# Altium PCB MCU.PcbDoc
Units mil, origin at the board's own origin, x right, y up, seen from the top; angles counter-clockwise.
Board outline 3664.37 x 2121.06 mil, 2 copper layers (Top Layer, Bottom Layer); 41 components, 39 nets, 222 pads, 31 vias.
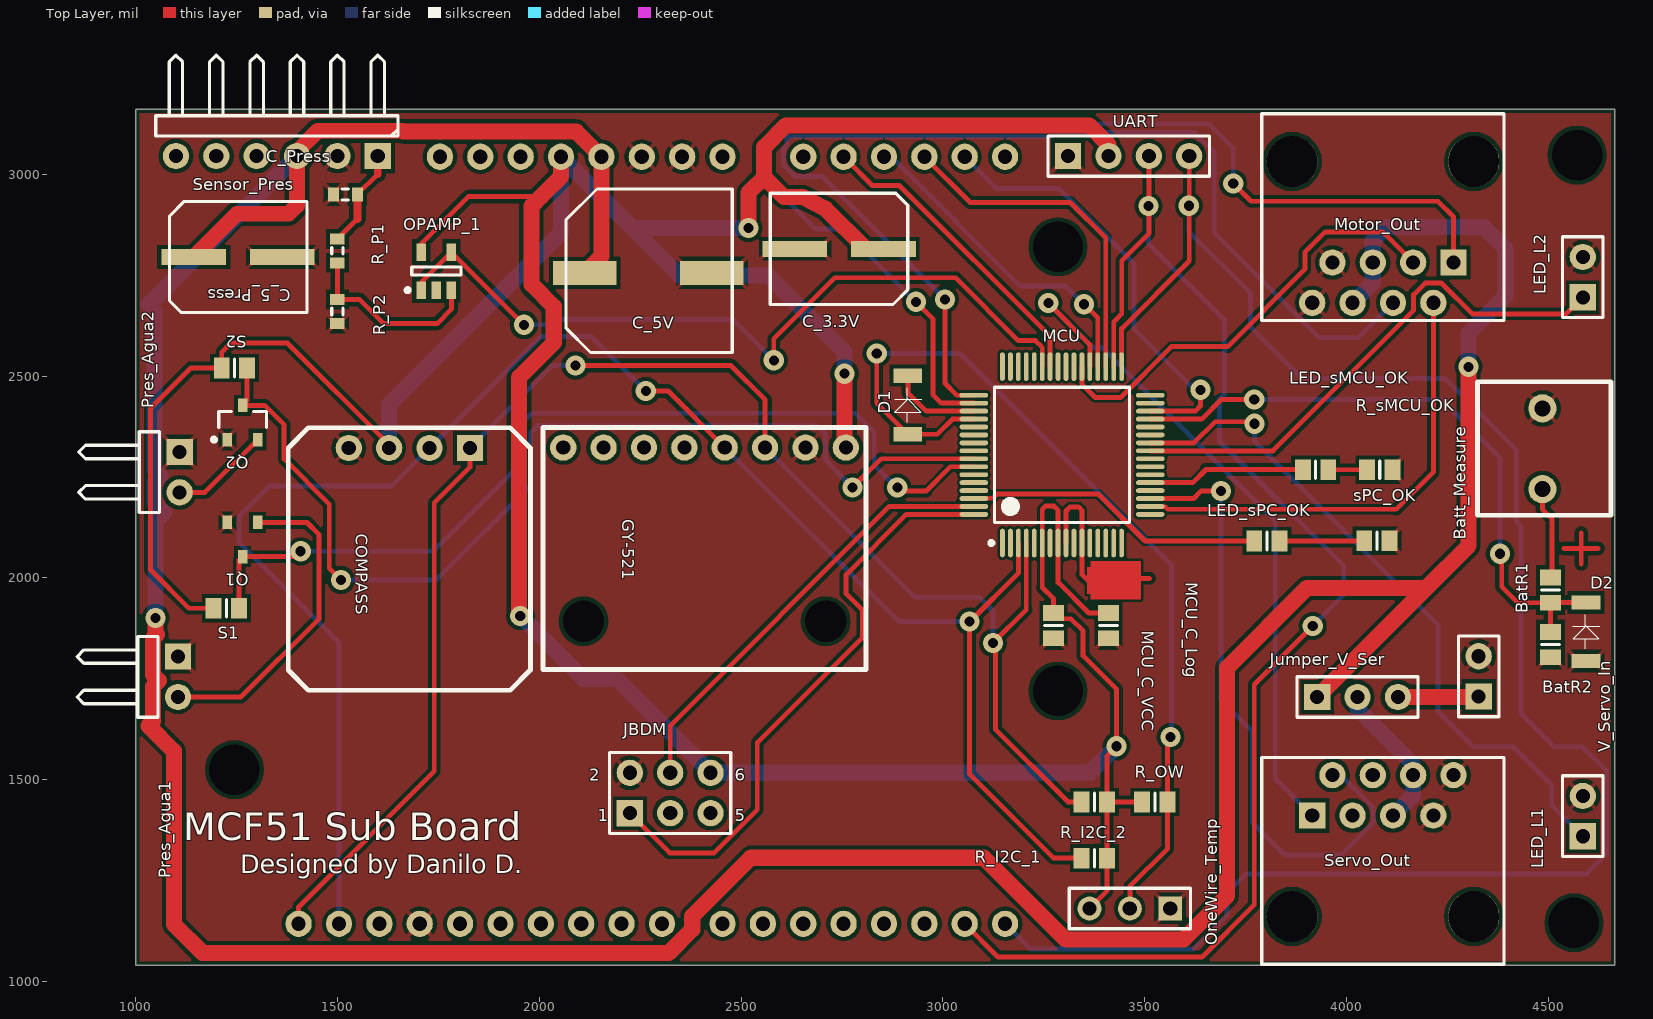
[diagram p0: Top Layer view]
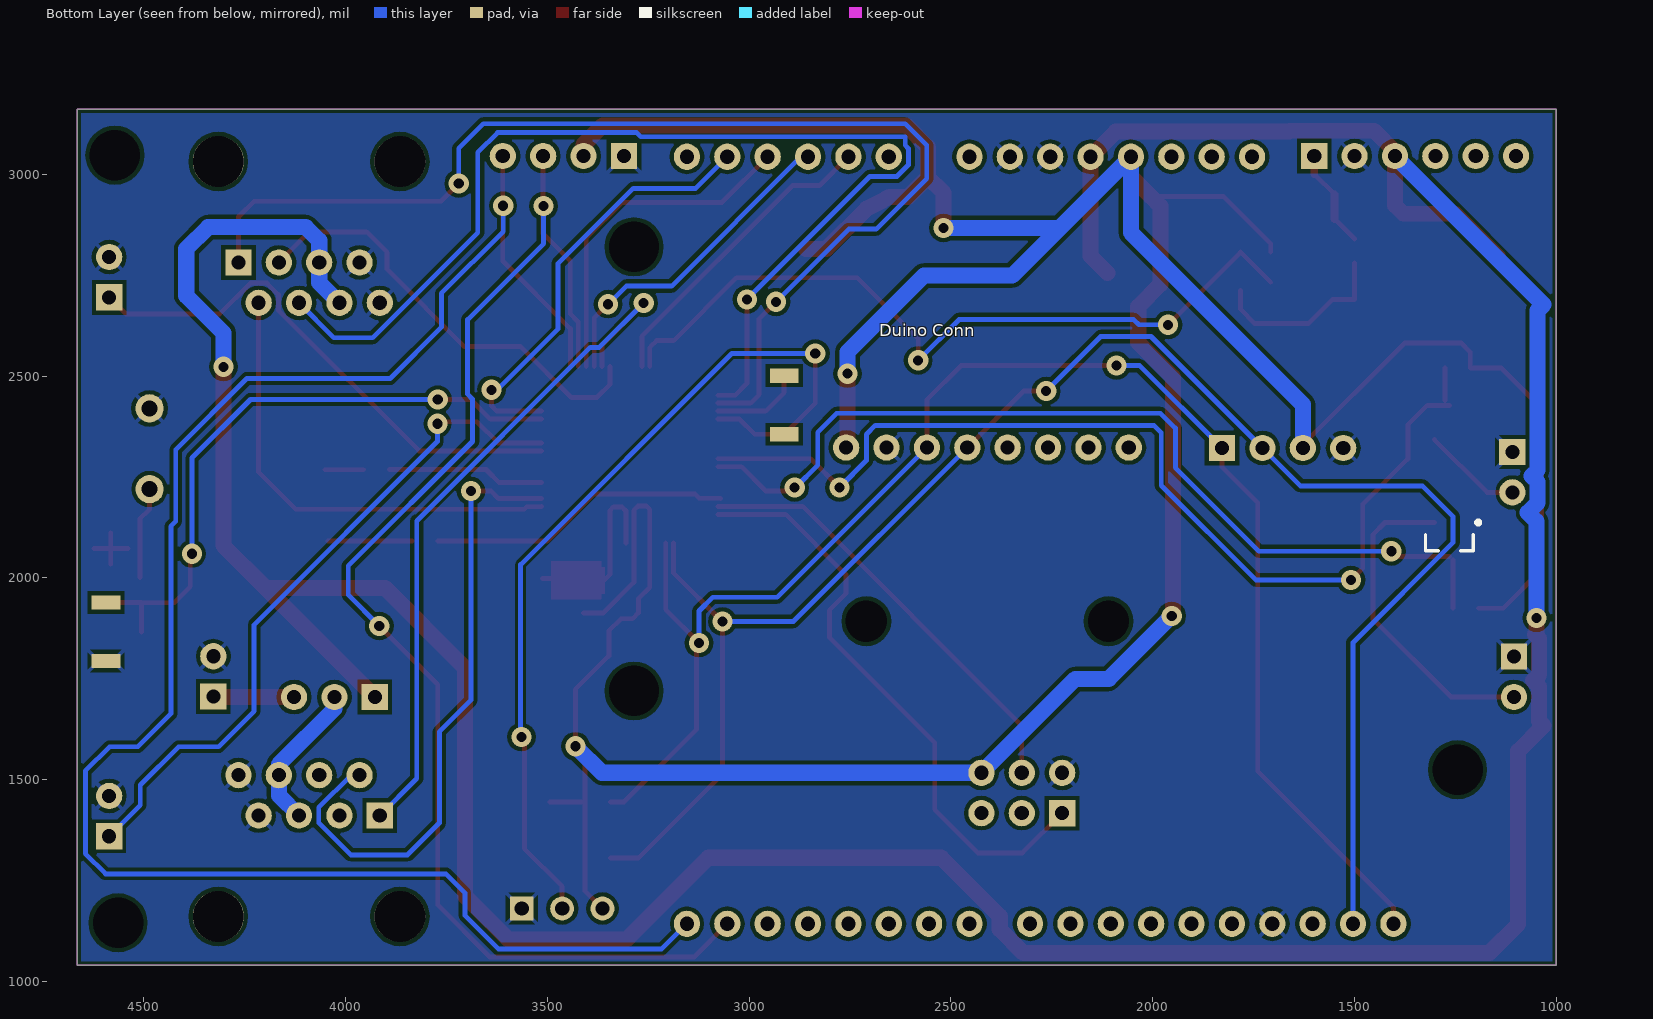
[diagram p1: Bottom Layer view, seen from below]

## Layer stack, top to bottom
Top Solder: solder mask 0.4, Solder Resist, Dk 3.5
Top Layer: signal copper 1.4
Dielectric 1: dielectric 12.6, FR-4, Dk 4.8
Bottom Layer: signal copper 1.4
Bottom Solder: solder mask 0.4, Solder Resist, Dk 3.5

## Board outline
1000,1040.35 4664.37,1040.35 4664.37,3161.42 1000,3161.42

## Design rules (kind name [scope] priority, off if disabled: settings)
Clearance "Clearance Room MCU" [TouchesRoom('MCU_ROOM_R')] p1: gap=7
Clearance Clearence_All [All] p2: gap=10
ComponentClearance ComponentClearance_1 [All] p1: gap=10 collisioncheckmode=3 verticalgap=10 showdistances=FALSE
PlaneConnect [All] p1: planeconnectstyle=Relief reliefexpansion=20 reliefentries=2 reliefconductorwidth=10 reliefairgap=10
PolygonConnect [All] p1: connectstyle=Relief reliefconductorwidth=10 reliefentries=4 polygonreliefangle="45 Angle" airgapwidth=10
RoomDefinition MCU_ROOM_R [InComponentClass('Components Class 1')] p1: confinementstyle=ConfineIn formatcopy=TRUE lockcomponents=FALSE outline 3012,2579 3631,2579 3631,2022 3012,2022
RoutingCorners [All] p1: cornerstyle=45-Degree minsetback=100 maxsetback=1000
RoutingVias [All] p1: holewidth=25 width=50 viastyle="Through Hole" minholewidth=25 minwidth=50 maxholewidth=25 maxwidth=50
SolderMaskExpansion [All] p1: expansion=4
Width [All] p1: maxlimit=40 minlimit=10 preferedwidth=12
27 further rules are at their usual default settings.

## Classes and differential pairs
component class "Components Class 1": MCU
component class PWM_OUTS: Jumper_V_Ser LED_L1 LED_L2 Motor_Out Servo_Out V_Servo_In
component class Presencia_Agua: Pres_Agua1 Pres_Agua2 Q1 Q2 S1 S2
component class MCU: BatR1 BatR2 Batt_Measure COMPASS D1 D2 GY-521 JBDM LED_sMCU_OK LED_sPC_OK OneWire_Temp R_I2C_1 R_I2C_2 R_OW R_sMCU_OK sPC_OK UART
component class Fuente: C_3.3V C_5V MCU_C_Log MCU_C_VCC
component class "Expansion Board": "Duino Conn"
component class ADC_PRES: C_5_Press C_Press OPAMP_1 R_P1 R_P2 Sensor_Pres

## Components (designator, comment, footprint, x,y, rotation, side; value= is the part's Value field where it differs from the comment)
BatR1 "Res" 6-0805_L 4505,1970 r90 top
BatR2 "Res" 6-0805_L 4505,1835 r90 top
Batt_Measure "Header Batt_M" "5.08mm 200 mil Screw Terminal SF" 4485,2420 r270 top
C_3.3V "Cap Pol1" "Capacitor S Panasonic" 2742,2815 r180 top
C_5_Press "Cap Pol1" "Capacitor S Panasonic" 1255,2795 r0 top
C_5V "330C" "C Panasonic Size Cap Pol" 2270,2755.5 r0 top
C_Press "Cap" J1-0603 1520,2950 r0 top
COMPASS "HMC6352" HMC6352_SF 1988.19,2381.89 r180 top
D1 "Diode 1N4148" miniMELF 2955,2332 r90 top
D2 "Diode Zenner 3.3V" miniMELF 4635,1770 r90 top
"Duino Conn" "" UNO_R3_SHIELD_NOLABELS 1003.94,1043.31 r90 bottom locked
GY-521 "MPU-6050 Board GY-521" GY-521 1909.45,2322.83 r270 top
JBDM "Header 3X2" HDR2X3 2224.41,1417.32 r0 top
Jumper_V_Ser "Header 3" HDR1X3#1 3927,1705 r0 top
LED_L1 "Header 1" HDR1X2 4585,1360 r90 top
LED_L2 "Header 2" HDR1X2 4585,2695 r90 top
LED_sMCU_OK "LED" 6-0805_L 3923,2268 r0 top
LED_sPC_OK "LED" 6-0805_L 3802.64,2091.46 r0 top
MCU "MCF51QE128CLH" 840F-02_N 3295,2305 r90 top
MCU_C_Log "Cap Pol1" 6-0805_L 3410,1882 r270 top
MCU_C_VCC "Cap Pol1" 6-0805_L 3274,1882 r270 top
Motor_Out "" RJ45-8 4089.75,3031.5 r180 top
OneWire_Temp "" HDR1X3#2 3562.99,1181.1 r180 top
OPAMP_1 "OPA345NA/250" TI-DBV5_N 1745,2760 r90 top
Pres_Agua1 "Jumper_STANDAR" HDR1X2H 1105.32,1805.12 r270 top
Pres_Agua2 "Jumper_STANDAR" HDR1X2H 1109.25,2312.01 r270 top
Q1 "PNP" SOT-23B_L#1 1265,2095 r90 top
Q2 "PNP" SOT-23B_L#2 1265,2385 r90 top
R_I2C_1 "Res3" 6-0805_L 3375,1306 r0 top
R_I2C_2 "Res3" 6-0805_L 3375,1445 r0 top
R_OW "Res" 6-0805_L 3525,1445 r180 top
R_P1 "Res3" J1-0603 1500,2810 r90 top
R_P2 "Res3" J1-0603 1500,2660 r90 top
R_sMCU_OK "Res" 6-0805_L 4082,2268 r180 top
S1 "Res" 6-0805_L 1225,1925 r180 top
S2 "Res" 6-0805_L 1245,2520 r180 top
Sensor_Pres "MPX5700AP" HDR1X6H 1600,3045 r180 top (schematic designator *)
Servo_Out "" RJ45-8 4089.75,1161.42 r0 top
sPC_OK "Res" 6-0805_L 4075,2092 r180 top
UART "Header 4" HDR1X4 3310,3045 r0 top
V_Servo_In "Header 2" HDR1X2 4327,1706 r90 top

## Footprints (in the part's own frame and the unit in brackets; to place one, negate y for a bottom-side part, rotate by r counter-clockwise, add the part's x,y. Pads: shape width x height; smd on the part's side, far side on the other; paste and mask are expansions set on the pad)
"5.08mm 200 mil Screw Terminal SF" [mil]
  round 70 hole 40: 1(0,0) 2(200,0)
  silkscreen extent -66,-161 265,170
6-0805_L [mm] "Chip Resistor, Body 2.0x1.2mm, IPC High Density"
  rect 1x1.3 smd: 1(-0.8,0) 2(0.8,0)
  silkscreen extent 0,-0.55 0,0.55, body extent -1.07,-0.7 1.07,0.7, height 0.7
840F-02_N [mm] "Thin QFP, 64-Leads, Body 10x10mm, Pitch 0.5mm, IPC Medium Density"
  oval 1.8x0.3 smd: 1(-5.55,3.75) 2(-5.55,3.25) 3(-5.55,2.75) 4(-5.55,2.25) 5(-5.55,1.75) 6(-5.55,1.25) 7(-5.55,0.75) 8(-5.55,0.25) 9(-5.55,-0.25) 10(-5.55,-0.75) 11(-5.55,-1.25) 12(-5.55,-1.75) 13(-5.55,-2.25) 14(-5.55,-2.75) 15(-5.55,-3.25) 16(-5.55,-3.75) 33(5.55,-3.75) 34(5.55,-3.25) 35(5.55,-2.75) 36(5.55,-2.25) 37(5.55,-1.75) 38(5.55,-1.25) 39(5.55,-0.75) 40(5.55,-0.25) 41(5.55,0.25) 42(5.55,0.75) 43(5.55,1.25) 44(5.55,1.75) 45(5.55,2.25) 46(5.55,2.75) 47(5.55,3.25) 48(5.55,3.75)
  oval 0.3x1.8 smd: 17(-3.75,-5.55) 18(-3.25,-5.55) 19(-2.75,-5.55) 20(-2.25,-5.55) 21(-1.75,-5.55) 22(-1.25,-5.55) 23(-0.75,-5.55) 24(-0.25,-5.55) 25(0.25,-5.55) 26(0.75,-5.55) 27(1.25,-5.55) 28(1.75,-5.55) 29(2.25,-5.55) 30(2.75,-5.55) 31(3.25,-5.55) 32(3.75,-5.55) 49(3.75,5.55) 50(3.25,5.55) 51(2.75,5.55) 52(2.25,5.55) 53(1.75,5.55) 54(1.25,5.55) 55(0.75,5.55) 56(0.25,5.55) 57(-0.25,5.55) 58(-0.75,5.55) 59(-1.25,5.55) 60(-1.75,5.55) 61(-2.25,5.55) 62(-2.75,5.55) 63(-3.25,5.55) 64(-3.75,5.55)
  silkscreen extent -5.67,-4.25 4.25,4.57, body extent -5,-5 5,5, height 1.6
"C Panasonic Size Cap Pol" [mm]
  rect 4x1.5 smd: 1(-4,0) 2(4,0)
  silkscreen extent -5.18,-5 5.28,5.28, body extent -5.09,-5.09 5.21,5.21, height 12.7
"Capacitor S Panasonic" [mil]
  rect 160x39.37 smd: 1(-110.74,0) 2(108.74,0)
  silkscreen extent -171,-138 170,138, body extent -169,-164 158,162, height 276
GY-521 [mil]
  round 65 hole 35: 1(0,850) 2(0,750) 3(0,650) 4(0,550) 5(0,450) 6(0,350) 7(0,250) 8(0,150)
  round 60 hole 102.36: SCREW1(430,800) SCREW2(430,200)
  silkscreen extent -50,100 550,900
HDR1X2 [mil] "Connector; Header; 2 Position"
  rect 65x65 hole 35: 1(0,0)
  round 65 hole 35: 2(100,0)
  silkscreen extent -50,-50 150,50
HDR1X2H [mil] "Connector; Header; 2 Position; Right Angle"
  rect 65x65 hole 35: 1(0,0)
  round 65 hole 35: 2(100,0)
  silkscreen extent -50,-250 150,-50
HDR1X3#1 [mil] "Connector; Header; 3 Position"
  rect 65x65 hole 35: 1(0,0)
  round 65 hole 35: 2(100,0) 3(200,0)
  silkscreen extent -50,-50 250,50
HDR1X3#2 [mil] "Connector; Header; 3 Position"
  rect 59.06x59.06 hole 35.43: 1(0,0)
  round 59.06 hole 35.43: 2(100,0) 3(200,0)
  silkscreen extent -50,-50 250,50
HDR1X4 [mil] "Connector; Header; 4 Position"
  rect 65x65 hole 35: 1(0,0)
  round 65 hole 35: 2(100,0) 3(200,0) 4(300,0)
  silkscreen extent -50,-50 350,50
HDR1X6H [mil] "Connector; Header; 6 Position; Right Angle"
  rect 65x65 hole 35: 1(0,0)
  round 65 hole 35: 2(100,0) 3(200,0) 4(300,0) 5(400,0) 6(500,0)
  silkscreen extent -50,-250 550,-50
HDR2X3 [mil] "Connector; Header; 3x2 Position"
  rect 65x65 hole 35: 1(0,0)
  round 65 hole 35: 2(0,100) 3(100,0) 4(100,100) 5(200,0) 6(200,100)
  silkscreen extent -50,-50 250,150
HMC6352_SF [mil]
  rect 65x65 hole 35: 1(160,60)
  round 65 hole 35: 2(260,60) 3(360,60) 4(460,60)
  silkscreen extent 10,10 610,660
J1-0603 [mm] "Chip Resistor, Body 1.6x0.8mm, IPC High Density"
  rect 0.7x0.9 smd: 1(-0.75,0) 2(0.75,0)
  silkscreen extent -0.2,-0.35 0.2,0.35, body extent -0.85,-0.48 0.85,0.48, height 0.9
miniMELF [mil]
  rect 35.43x70.87 all layers, no hole: 1(24,42) 2(169,42)
  silkscreen extent 54,8 139,75
RJ45-8 [mil]
  round 126 hole 126: 1(-225,0) 1(225,0)
  rect 65x65 hole 35: 1(-175,250)
  round 65 hole 35: 2(-125,350) 3(-75,250) 4(-25,350) 5(25,250) 6(75,350) 7(125,250) 8(175,350)
  silkscreen extent -300,-118 300,394
SOT-23B_L#1 [mm] "SOT23, 3-Leads, Body 2.9x1.3mm, Pitch 0.95mm, Lead Span 2.4mm, IPC High Density"
  rect 0.85x0.6 smd: 1(1.075,0.95) 2(1.075,-0.95) 3(-1.075,0)
  body extent -0.7,-1.5 0.7,1.5, height 1.14
SOT-23B_L#2 [mm] "SOT23, 3-Leads, Body 2.9x1.3mm, Pitch 0.95mm, Lead Span 2.4mm, IPC High Density"
  rect 0.85x0.6 smd: 1(-1.075,0.95) 2(-1.075,-0.95) 3(1.075,0)
  silkscreen extent -1.2,-1.5 0.7,1.92, body extent -0.7,-1.5 0.7,1.5, height 1.14
TI-DBV5_N [mm] "SOT23, 5-Leads, Body 2.9x1.6mm, Pitch 0.95mm, IPC Medium Density"
  rect 1.1x0.6 smd: 1(-1.2,0.95) 2(-1.2,0) 3(-1.2,-0.95) 4(1.2,-0.95) 5(1.2,0.95)
  silkscreen extent -1.32,-1.55 0.25,1.92, body extent -0.87,-1.52 0.87,1.53, height 1.45
UNO_R3_SHIELD_NOLABELS [mil]
  round 65 hole 35: 3.3V(2000,1050) 5V(2000,1150) A0(2000,1650) A1(2000,1750) A2(2000,1850) A3(2000,1950) A4(2000,2050) A5(2000,2150) AREF(100,600) D2(100,1950) D3(100,1850) D4(100,1750) D5(100,1650) D6(100,1550) D7(100,1450) D8(100,1300) D9(100,1200) D10(100,1100) D11(100,1000) D12(100,900) D13(100,800) GND@0(2000,1250) GND@1(2000,1350) GND@2(100,700) IOREF(2000,850) NC(2000,750) RES(2000,950) RX(100,2150) SCL(100,400) SDA(100,500) TX(100,2050) VIN(2000,1450)

## Part data
BatR1 BatR2 R_OW R_sMCU_OK S1 S2 sPC_OK: library part Res3, "Resistor"
Batt_Measure LED_L1: library part "Header 2", "Header, 2-Pin"
C_3.3V C_5_Press MCU_C_Log MCU_C_VCC: "Polarized Capacitor (Radial)"
C_5V: library part "Cap Pol1", "Polarized Capacitor (Radial)"
C_Press: "Capacitor"
D1: "High Conductance Fast Diode"
D2: library part "Diode 1N4148", "High Conductance Fast Diode"
"Duino Conn": library part ARDUINO_R3_SHIELDNOLABELS
GY-521: library part GY-521
JBDM: "Header, 3-Pin, Dual row"
Jumper_V_Ser: "Header, 3-Pin"
LED_L2 V_Servo_In: "Header, 2-Pin"
LED_sMCU_OK LED_sPC_OK: library part LED2, "Typical RED, GREEN, YELLOW, AMBER GaAs LED"
MCU: "MCF51QE128 ColdFire V1 Microcontroller, 32-Bit, 128KB Flash, 8KB RAM, -40°C to 85°C, 64-Pin LQFP"
Motor_Out Servo_Out: library part RJ45-8PTH
OneWire_Temp: library part M03-SCREW-5MM
OPAMP_1: "Low Power, Single-Supply, Rail-to-Rail Operational Amplifier MicroAmplifier(TM) Series, 2.7 to 5.5 V, -55 to 125 degC, 5-pin SOT23 (DBV5), Green (RoHS & no Sb/Br)"
Q1 Q2: "PNP Bipolar Transistor"
R_I2C_1 R_I2C_2 R_P1 R_P2: "Resistor"
UART: "Header, 4-Pin"

## Free pads (board coordinates)
  round 70 hole 125: 0(3285,1720) 1(3285,2820) 2(1245,1525)
  round 60 hole 125: 3(4562.99,1145.67) 5(4570.87,3047.24)

## Via types
v1: diameter 50, hole 25, Top Layer to Bottom Layer, 31 vias

## Nets (pads, with @x,y where several pads share a name; then routed paths per layer and width w, separated by ;. In a path a pad name is that pad's centre, name@x,y a point inside that pad or via, vN(x,y) a via of type N, cw(c..) or ccw(c..) an arc to the next point about the centre after c; other vN are vias at no path point)
+3.3V: "Duino Conn.3.3V" C_3.3V.1 COMPASS.3 GY-521.1 JBDM.6 MCU.6 MCU.8 MCU_C_Log.1 MCU_C_VCC.1 OneWire_Temp.3 OPAMP_1.5 R_I2C_1.2 R_I2C_2.2 R_OW.2 S1.2 S2.2 UART.2 | length 10173.5
  Top Layer w12: S1.2 1132,1925 1037,2020 1037,2420 1137,2520 S2.2 1213.5,2559.5 1236,2582 1376,2582 COMPASS.3@1628.19,2329.81 ; OPAMP_1.5 1707.6,2827.6 1825,2945 2005,2945 ; MCU.6 3245.79,1976.21 3274,1948 MCU_C_VCC.1 3288.5,1899 3317,1899 3347,1869 3347,1807 3430,1724 v1(3430,1583) 3406.5,1559.5 R_I2C_2.2 ; MCU.6@3246,2086.71 3246,2170 3254,2178 3275,2178 3285.16,2167.84 MCU.8 3285.16,1988.84 3360.5,1913.5 MCU_C_Log.1 ; OneWire_Temp.3 3406.5,1224.61 R_I2C_1.2 R_I2C_2.2 ; R_OW.2 R_I2C_2.2
  Top Layer w40: v1(1953,1906) 1950,1909 1950,2497 2036,2583 2036,2672 1981,2727 1981,2921 2005,2945 2053.94,2993.94 2053.94,3043.31 ; v1(2518,2867) 2518,2954 2557,2993 ; GY-521.1@2756,2326.29 v1(2756,2506) ; C_3.3V.1@2859,2815 2808.74,2815 2708.74,2915 2651.74,2944 2606,2944 2557,2993 ; UART.2 3410,3073 3362,3121 2611,3121 2557,3067 2557,2993
  Bottom Layer w40: COMPASS.3 1628.19,2429.59 2053.94,2855.34 2053.94,3043.31 2143.12,2954.12 ; v1(1953,1906) 2109,1750 2191.73,1750 JBDM.6 3364.32,1517.32 v1(3430,1583) ; v1(2518,2867) 2230.25,2867 2143.12,2954.12 ; v1(2756,2506) 2756,2560 2567,2749 2348.25,2749 2143.12,2954.12
+5V: "Duino Conn.5V" C_5_Press.1 C_5V.1 Jumper_V_Ser.1 Motor_Out.5 Motor_Out.6 Sensor_Pres.3 | length 9558.1
  Top Layer w39.37: C_5_Press.1 1251.26,2902 1379,2902 1400,2923 Sensor_Pres.3 1400,3056.37 1451.32,3107.68 1660.99,3107.68 1662.69,3105.99 2092,3105.99 2092,3105.25 2153.94,3043.31 2153.94,2796.92 C_5V.1
  Top Layer w40: v1(1049.65,1901) 1049.65,1862.35 1052.38,1859.62 1042.81,1850.04 1042.81,1760.19 1057.41,1745.6 1042.81,1731.01 1042.81,1644.81 1032,1634 1095.09,1570.91 1095.09,1270.18 1095,1270.08 1095,1142.05 1166.2,1070.85 2320.58,1070.85 2379,1129.27 2379,1162 2524,1307 3101,1307 3304,1104 3595.49,1104 3704,1212.51 3704,1778 3901,1975 4197,1975 ; Jumper_V_Ser.1 4197,1975 ; v1(4302,2523) 4302,2080 4197,1975
  Bottom Layer w40: v1(1049.65,1901) 1049.65,2140.52 1071,2161.87 1046.75,2186.12 1046.75,2237.89 1061.34,2252.49 1046.75,2267.08 1046.75,2662.25 1032,2677 Sensor_Pres.3 ; Motor_Out.6 4064.75,2731.5 Motor_Out.5 4064.75,2835.75 4098,2869 4340,2869 4394,2815 4394,2699 4302,2607 v1(4302,2523)
+V_SERVO: Jumper_V_Ser.3 V_Servo_In.1 | length 199
  Top Layer w39.37: Jumper_V_Ser.3 V_Servo_In.1@4326,1705
+V_SERVO_IN: Jumper_V_Ser.2 Servo_Out.5 Servo_Out.6 | length 371.4
  Bottom Layer w39.37: Jumper_V_Ser.2 4027,1676 4164.75,1538.25 Servo_Out.6 4164.75,1461.42 Servo_Out.5
AD1: "Duino Conn.A1" MCU.42 | length 770.8
  Top Layer w12: 2753.94,3043.31 2825.25,2972 2892,2972 3265.47,2598.53 MCU.42
AD2: "Duino Conn.A2" MCU.36 | length 798.2
  Top Layer w12: v1(3349,2678) 3350.22,2678 3383.58,2644.63 MCU.36
  Bottom Layer w12: 2871.69,3043.31 3192,2723 3304,2723 v1(3349,2678)
AD3: "Duino Conn.A3" MCU.35 | length 851.3
  Top Layer w12: 2953.94,3043.31 3067.25,2930 3315.46,2930 3403.27,2842.19 MCU.35
AD4: "Duino Conn.A4" MCU.30 | length 1087.9
  Top Layer w12: MCU.30 3625.27,2413.27 3638,2426 v1(3638,2466)
  Bottom Layer w12: 3053.94,3043.31 3132.25,2965 3287,2965 3473,2779 3473,2617 3624,2466 v1(3638,2466)
AD5_BAT: BatR1.1 BatR2.2 D2.2 MCU.29 | length 1559.1
  Top Layer w12: MCU.29 3640.58,2393.58 3689,2442 ; 3694,2442 v1(3771,2442) ; v1(4380,2060) 4384,2056 4384,1978 4423.5,1938.5 BatR1.1 BatR2.2 ; BatR1.1@4505.5,1939 D2.2
  Bottom Layer w12: v1(3771,2442) 4235,2442 4380,2297 v1(4380,2060)
ADC_PRESSURE_3.3V: MCU.43 OPAMP_1.1 OPAMP_1.4 | length 1923
  Top Layer w12: OPAMP_1.1@1707.6,2732.44 OPAMP_1.4 1962,2627.65 v1(1962,2627) ; v1(2581,2539) 2581,2592 2732.5,2743.5 3031.5,2743.5 3187,2588 3229,2588 3243.47,2573.53 ; MCU.43 3245.79,2571.21
  Bottom Layer w12: v1(1962,2627) 2034,2627 2047,2640 2480,2640 v1(2581,2539)
BKGD: JBDM.1 MCU.64 | length 1486.3
  Top Layer w12: JBDM.1 2322.73,1319 2433,1319 2540,1426 2540,1592 2801,1853 2801,1920 2760,1961 2760,2008.36 2909,2157.36 MCU.64
GND: "Duino Conn.GND@0" "Duino Conn.GND@1" "Duino Conn.GND@2" BatR2.1 Batt_Measure.1 C_3.3V.2 C_5_Press.2 C_5V.2 C_Press.1 COMPASS.4 D2.1 GY-521.2 JBDM.2 LED_L1.2 LED_L2.2 MCU.9 MCU.11 MCU_C_Log.2 MCU_C_VCC.2 Motor_Out.7 Motor_Out.8 OneWire_Temp.1 OPAMP_1.2 Pres_Agua1.1 Pres_Agua2.1 Q1.1 Q2.1 R_P2.1 R_sMCU_OK.1 Sensor_Pres.2 Servo_Out.7 Servo_Out.8 sPC_OK.1 UART.1 V_Servo_In.2 | length 465.2
  Top Layer w12: MCU.9 3304.84,2165.84 3315,2176 3336,2176 3344.21,2167.79 MCU.11 3344.21,2008.79 3383,1970 ; 3392,1995 3402,1995 ; 3397,2004 3402,2004 ; 3402,1999 3512,1999
LEDLIGHT1: LED_L1.1 MCU.26 | length 1697
  Top Layer w12: MCU.26 3621.53,2334.53 3674,2387 v1@3772,2387
  Bottom Layer w12: v1(3772,2382) 3772,2338 4226,1884 4226,1670 4314,1582 4413,1582 4508,1487 4508,1437 LED_L1.1
LEDLIGHT2: LED_L2.1 MCU.25 | length 1314.6
  Top Layer w12: MCU.25 3817.26,2314.84 4165.84,2663.43 4165.84,2701.75 4194.49,2730.4 4235.01,2730.4 4311.31,2654.09 4544.09,2654.09 LED_L2.1
M1_ESC: MCU.50 Motor_Out.1@4264.75,2781.5 | length 2925.9
  Top Layer w12: v1(2933,2684) 2975,2642 2975,2454 2996.05,2432.95 MCU.50 ; v1(3719,2977) 3763,2933 4226,2933 4264.75,2894.25 Motor_Out.1@4264.75,2781.5
  Bottom Layer w12: v1(2933,2684) 2753,2864 2685,2864 2560,2989 2560,3072 2613,3125 3658,3125 3719,3064 v1(3719,2977)
M2_ESC: MCU.18 Motor_Out.2 | length 1161.9
  Top Layer w12: MCU.18 3514.28,2176.27 3550.86,2176.27 3557.13,2170 4123,2170 4214.75,2261.75 Motor_Out.2
M3_ESC: MCU.38 Motor_Out.3 | length 1103.5
  Top Layer w12: MCU.38 3344.21,2479.79 3377,2447 3440,2447 3566,2573 3705,2573 3896.45,2764.45 3896.45,2806.45 3947,2857 4089.24,2857 Motor_Out.3
M4_ESC: MCU.49 Motor_Out.4 | length 2771.7
  Top Layer w12: v1(3005,2690) 3005,2482 3034.36,2452.64 MCU.49
  Bottom Layer w12: v1(3005,2690) 2700.69,2994.31 2633.64,2994.31 2604.94,3023.01 2604.94,3063.6 2613,3071.67 2613,3093 3268.2,3093 3278.2,3103 3623,3103 3672,3054 3672,2854.95 3931.95,2595 4028.25,2595 Motor_Out.4
NetBatR1_2: BatR1.2 Batt_Measure.2 | length 228.4
  Top Layer w12: Batt_Measure.2 4485,2170.37 4509,2146.37 4509,2095.12 BatR1.2@4509,2001.5
NetLED_sMCU_OK_2: LED_sMCU_OK.2 R_sMCU_OK.2 | length 96
  Top Layer w12: LED_sMCU_OK.2 R_sMCU_OK.2
NetLED_sPC_OK_2: LED_sPC_OK.2 sPC_OK.2 | length 208.8
  Top Layer w12: LED_sPC_OK.2 sPC_OK.2@4042.97,2091.46
NetOPAMP_1_3: OPAMP_1.3 R_P1.1 R_P2.2 | length 460
  Top Layer w12: R_P1.1 R_P2.2 1555.47,2689.53 1615,2630 1747,2630 1782.4,2665.4 OPAMP_1.3
NetPres_Agua1_2: Pres_Agua1.2 Q1.2 | length 802.3
  Top Layer w12: Pres_Agua1.2 1261.12,1705.12 1454,1898 1454,2108 1424.68,2137.32 Q1.2
NetPres_Agua2_2: Pres_Agua2.2 Q2.2 | length 247.3
  Top Layer w12: Pres_Agua2.2 1171.73,2212.01 Q2.2
P_OUT: C_Press.2 R_P1.2 Sensor_Pres.1 | length 246.9
  Top Layer w12: R_P1.2 1549.53,2889.05 ; C_Press.2 1600,3000.47
  Top Layer w19.68: 1549.53,2889.05 C_Press.2 ; 1600,3000.47 Sensor_Pres.1
PRESENCIAAGUA1: MCU.58 Q1.3 S1.1 | length 2288.3
  Top Layer w12: S1.1 Q1.3@1256.5,2044.17 ; Q1.3 1395.68,2052.68 v1(1409,2066) ; v1(2887,2224) 2896,2215 2958,2215 3018.47,2275.47 MCU.58
  Bottom Layer w12: v1(1409,2066) 1737,2066 1944,2273 1944,2371 1981,2408 2783,2408 2830,2361 2830,2279 2885,2224 v1(2887,2224)
PRESENCIAAGUA2: MCU.57 Q2.3 S2.1 | length 2580.8
  Top Layer w12: Q2.3 1319.68,2427.32 1368,2379 1368,2295 1480,2183 1480,2024 v1(1509,1995) ; Q2.3@1276.5,2438.82 S2.1 ; v1(2776,2224) 2847.16,2295.16 MCU.57
  Bottom Layer w12: v1(1509,1995) 1745,1995 1979,2229 1979,2360 1997,2378 2687,2378 2709,2356 2709,2291 v1(2776,2224)
RESET: JBDM.4 MCU.63 | length 1093.9
  Top Layer w12: JBDM.4 2324.41,1634.37 2867.08,2177.05 MCU.63
RXSERIALCOM: "Duino Conn.TX" MCU.34 UART.3 | length 3395.5
  Top Layer w12: 3053.94,1143.31 3136.25,1061 3642,1061 3771,1190 3771,1736 v1(3916,1881) ; MCU.34 3422.95,2633.95 3443,2654 3443,2786 3510,2853 UART.3
  Bottom Layer w12: v1(3509,2921) 3509,2828 3697,2640 3697,2455 3685,2443 3685,2338 3993,2030 3993,1958 v1(3916,1881)
RXSERIALCOM2: D1.1 MCU.52 OneWire_Temp.2 R_OW.1 | length 2252.2
  Top Layer w12: v1(2836,2556) 2836,2433 D1.1 2986,2356 3023.58,2393.58 MCU.52 ; OneWire_Temp.2 3462.99,1235.99 3556.5,1329.5 R_OW.1 3556.5,1598.5 v1(3564,1606)
  Bottom Layer w12: v1(2836,2556) 3043,2556 3566,2033 3566,1608 v1(3564,1606)
S_PANCAMERA: MCU.19 Servo_Out.2 | length 1553.9
  Top Layer w12: MCU.19 3620.73,2196.73 3638.95,2214.95 v1(3688.97,2214.95)
  Bottom Layer w12: v1@3688.97,2215.97 v1(3688.97,2214.95) 3688.97,1697.03 3767,1619 3767,1393 3846,1314 3986.63,1314 4065.75,1393.12 4065.75,1431.56 Servo_Out.2@3985.89,1511.42
S_TILTCAMERA: MCU.37 Servo_Out.1@3914.75,1411.42 | length 1753.4
  Top Layer w12: v1(3261,2681) 3363.9,2578.1 MCU.37
  Bottom Layer w12: v1(3261,2681) 3371,2571 3393,2571 3823,2141 3823,1503.17 Servo_Out.1@3914.75,1411.42
SCL: "Duino Conn.SCL" COMPASS.1 GY-521.3 MCU.4 R_I2C_2.1 | length 3912.7
  Top Layer w12: 1403.94,1143.31 1403.94,1184.94 1740,1521 1740,2186 1828.19,2274.19 COMPASS.1 ; v1(2090,2526) 2475,2526 2559.45,2441.55 GY-521.3 ; v1(3124,1839) 3206.42,1921.42 MCU.4 ; v1@3130,1833 3130,1625 3310,1445 R_I2C_2.1
  Bottom Layer w12: COMPASS.1 2032.3,2526 v1(2090,2526) ; GY-521.3 2930.29,1952 3090,1952 3124,1918 v1(3124,1839)
SCOM_IN: MCU.16
SDA: "Duino Conn.SDA" COMPASS.2 GY-521.4 MCU.3 R_I2C_1.1 | length 4385.3
  Top Layer w12: v1(2264,2463) 2319.29,2463 GY-521.4 ; MCU.3 3186.73,2011.73 3067,1892 v1(3066,1892) 3066,1514 3274,1306 R_I2C_1.1
  Bottom Layer w11.81: 1503.94,1143.31 1503.94,1840.06 1256,2088 1256,2152 1332,2228 1634.3,2228 COMPASS.2
  Bottom Layer w12: COMPASS.2 2004.3,2598 2129,2598 v1(2264,2463) ; GY-521.4 2890.29,1892 v1(3066,1892)
SMCU_OK: LED_sMCU_OK.1 MCU.21 | length 390.8
  Top Layer w12: MCU.21 3619.1,2236.1 3651.63,2268.63 LED_sMCU_OK.1@3890.87,2268.63
SPC_OK: LED_sPC_OK.1 MCU.62 | length 753
  Top Layer w12: MCU.62@3070.72,2196.73 3123.6,2197.61 3134,2208 3384,2208 3500.54,2091.46 LED_sPC_OK.1
TXSERIALCOM: "Duino Conn.RX" MCU.33 UART.4 | length 4519.9
  Top Layer w12: MCU.33 3442.64,2617.64 3610,2785 UART.4
  Bottom Layer w12: 3153.94,1143.31 3216.25,1081 3621,1081 3704,1164 3704,1220 3751,1267 4594,1267 4644,1317 4644,1522 4584,1582 4514,1582 4432,1664 4432,2128 4420,2140 4420,2318 4244,2494 3889,2494 3762,2621 3762,2705 3609,2858 v1(3609,2922)
TXSERIALCOM2: D1.2 MCU.51 | length 224.4
  Top Layer w12: D1.2 2913,2459 2958.73,2413.27 MCU.51
pads on no net: "Duino Conn.A0" "Duino Conn.A5" "Duino Conn.AREF" "Duino Conn.D2" "Duino Conn.D3" "Duino Conn.D4" "Duino Conn.D5" "Duino Conn.D6" "Duino Conn.D7" "Duino Conn.D8" "Duino Conn.D9" "Duino Conn.D10" "Duino Conn.D11" "Duino Conn.D12" "Duino Conn.D13" "Duino Conn.IOREF" "Duino Conn.NC" "Duino Conn.RES" "Duino Conn.VIN" GY-521.5 GY-521.6 GY-521.7 GY-521.8 GY-521.SCREW1 GY-521.SCREW2 JBDM.3 JBDM.5 MCU.1 MCU.2 MCU.5 MCU.7 MCU.10 MCU.12 MCU.13 MCU.14 MCU.15 MCU.17 MCU.20 MCU.22 MCU.23 MCU.24 MCU.27 MCU.28 MCU.31 MCU.32 MCU.39 MCU.40 MCU.41 MCU.44 MCU.45 MCU.46 MCU.47 MCU.48 MCU.53 MCU.54 MCU.55 MCU.56 MCU.59 MCU.60 MCU.61 Motor_Out.1@3864.75,3031.5 Motor_Out.1@4314.75,3031.5 Sensor_Pres.4 Sensor_Pres.5 Sensor_Pres.6 Servo_Out.1@3864.75,1161.42 Servo_Out.1@4314.75,1161.42 Servo_Out.3 Servo_Out.4
copper on no net: | length 163
  Top Layer w12: 4538,2073 4581,2073 4623,2073 ; 4581,2034 4581,2112

## Polygon pours and split planes (outlines as drawn)
GND on Top Layer "gnd mask" (solid, pour order 2): 1000,3161.42 1000,1040.35 4664.37,1040.35 4664.37,3161.42
GND on Bottom Layer "gnd mask" (solid, pour order 4): 1000,3161.42 1000,1040.35 4664.37,1040.35 4664.37,3161.42

## Keep-outs
Keep-Out Layer:
  lines w1: 4664.37,1040.35 4664.37,3161.42 ; 4664.37,1040.35 4664.37,1040.35 ; 4664.37,1040.35 1000,1040.35 1000,3161.42 4664.37,3161.42 ; 4664.37,3161.42 4664.37,3161.42

## Other copper
Top Layer:
  rectangle net GND: 3357,1960 3425,2027
  rectangle net GND: 3366,1947 3490,2042

## Silkscreen, mask and mechanical layers (free items; w line width, h text height)
Top Overlay:
  text "MCF51 Sub Board" at 1118.11,1326.77 h118.11
  text "Designed by Danilo D." at 1259.84,1251.97 h78.74

## Text inside footprints (layer, text, board x,y; h text height)
"Duino Conn": Mechanical 16 "ISP" at 3193.94,2023.31 h30 r270; Mechanical 16 "RST" at 3068.94,2118.31 h30 r270
JBDM: Top Overlay "6" at 2484.41,1497.32 h30; Top Overlay "5" at 2484.41,1397.32 h30; Top Overlay "2" at 2124.41,1497.32 h30; Top Overlay "1" at 2144.41,1397.32 h30